# EAGLE board Shiny Lappi-Bigery (EAGLE 9.7.0)

Size 208.9 x 130.84 mm. Coordinates in mm from the lower left corner, seen from the top.
Outline: 0,0 208.9,0 208.9,130.84 0,130.84 0,0
Copper layers (1*16): Top 0.035mm / dielectric 1.5mm / Bottom 0.035mm
Design rules "default": minimum track width 6mil, minimum drill 0.35mm, track to track 6mil, track to pad 6mil, pad to pad 6mil, via to via 6mil, smd to smd 6mil, copper to edge 40mil, drill to drill 6mil, minimum pad ring 10mil, minimum via ring 8mil, stop-mask expansion 4mil, vias tented up to drill 0mil, thermal gap 10mil

## Footprints (pad centres in the part's own frame; a part is rotated, then mirrored left to right if it is on the bottom)
SWITCH-MOMENTARY-PTH-6.5MM = drill 1.016 pad 1.88: 1 -3.251,2.261; 2 3.251,2.261; 3 -3.251,-2.261; 4 3.251,-2.261
ARDUINO-UNO-R3-SHIELD = drill 1.016 pad 1.88: 3.3V 24.13,-2.54; 5V 24.13,0; A0 24.13,12.7; A1 24.13,15.24; A2 24.13,17.78; A3 24.13,20.32; A4 24.13,22.86; A5 24.13,25.4; AREF -24.13,-13.97; D2 -24.13,20.32; D3 -24.13,17.78; D4 -24.13,15.24; D5 -24.13,12.7; D6 -24.13,10.16; D7 -24.13,7.62; D8 -24.13,3.81; D9 -24.13,1.27; D10 -24.13,-1.27; D11 -24.13,-3.81; D12 -24.13,-6.35; D13 -24.13,-8.89; GND@0 24.13,2.54; GND@1 24.13,5.08; GND@2 -24.13,-11.43; IOREF 24.13,-7.62; NC 24.13,-10.16; RES 24.13,-5.08; RX -24.13,25.4; SCL -24.13,-19.05; SDA -24.13,-16.51; TX -24.13,22.86; VIN 24.13,7.62

## Placement (x,y rotation side)
S1  SWITCH_MOMENTARY  [SWITCH-MOMENTARY-PTH-6.5MM]  8.26,44.7 90 top
S2  SWITCH_MOMENTARY  [SWITCH-MOMENTARY-PTH-6.5MM]  27.24,47.72 120 top
S3  SWITCH_MOMENTARY  [SWITCH-MOMENTARY-PTH-6.5MM]  45.25,47.83 120 top
S4  SWITCH_MOMENTARY  [SWITCH-MOMENTARY-PTH-6.5MM]  65.24,48.62 120 top
S5  SWITCH_MOMENTARY  [SWITCH-MOMENTARY-PTH-6.5MM]  83.91,48.5 120 top
S6  SWITCH_MOMENTARY  [SWITCH-MOMENTARY-PTH-6.5MM]  102.25,48.84 120 top
S7  SWITCH_MOMENTARY  [SWITCH-MOMENTARY-PTH-6.5MM]  123.36,48.82 120 top
S8  SWITCH_MOMENTARY  [SWITCH-MOMENTARY-PTH-6.5MM]  144.01,48.43 120 top
S9  SWITCH_MOMENTARY  [SWITCH-MOMENTARY-PTH-6.5MM]  165.97,48.16 120 top
S10  SWITCH_MOMENTARY  [SWITCH-MOMENTARY-PTH-6.5MM]  187.56,48.43 120 top
S11  SWITCH_MOMENTARY  [SWITCH-MOMENTARY-PTH-6.5MM]  18.64,26.41 90 top
S12  SWITCH_MOMENTARY  [SWITCH-MOMENTARY-PTH-6.5MM]  37.23,28.47 120 top
S13  SWITCH_MOMENTARY  [SWITCH-MOMENTARY-PTH-6.5MM]  57.45,28.93 120 top
S14  SWITCH_MOMENTARY  [SWITCH-MOMENTARY-PTH-6.5MM]  77.55,29.5 120 top
S15  SWITCH_MOMENTARY  [SWITCH-MOMENTARY-PTH-6.5MM]  94.99,30 120 top
S16  SWITCH_MOMENTARY  [SWITCH-MOMENTARY-PTH-6.5MM]  115.19,30.17 120 top
S17  SWITCH_MOMENTARY  [SWITCH-MOMENTARY-PTH-6.5MM]  137.21,30.05 120 top
S18  SWITCH_MOMENTARY  [SWITCH-MOMENTARY-PTH-6.5MM]  157.92,30.45 120 top
S19  SWITCH_MOMENTARY  [SWITCH-MOMENTARY-PTH-6.5MM]  179.36,31.14 120 top
S20  SWITCH_MOMENTARY  [SWITCH-MOMENTARY-PTH-6.5MM]  25.78,9.39 90 top
S21  SWITCH_MOMENTARY  [SWITCH-MOMENTARY-PTH-6.5MM]  47.95,9.34 120 top
S22  SWITCH_MOMENTARY  [SWITCH-MOMENTARY-PTH-6.5MM]  68.38,9.99 120 top
S23  SWITCH_MOMENTARY  [SWITCH-MOMENTARY-PTH-6.5MM]  90.84,10.33 120 top
S24  SWITCH_MOMENTARY  [SWITCH-MOMENTARY-PTH-6.5MM]  114.51,10.93 120 top
S25  SWITCH_MOMENTARY  [SWITCH-MOMENTARY-PTH-6.5MM]  135.89,11.08 120 top
S26  SWITCH_MOMENTARY  [SWITCH-MOMENTARY-PTH-6.5MM]  158.66,10.78 120 top
S27  SWITCH_MOMENTARY  [SWITCH-MOMENTARY-PTH-6.5MM]  200.25,31.9 90 top
S28  SWITCH_MOMENTARY  [SWITCH-MOMENTARY-PTH-6.5MM]  181.12,11.57 90 top
S29  SWITCH_MOMENTARY  [SWITCH-MOMENTARY-PTH-6.5MM]  200.65,11.97 90 top
U1  ARDUINO-UNO-R3-SHIELD  [ARDUINO-UNO-R3-SHIELD]  105.79,100.99 90 top

## Library data of the parts
S1-S29 U1 = Tinkercad

## Nets
S28_4: S28.4 S29.4
U1_D2: S3.2 S13.2 S22.2 U1.D2
U1_D3: S4.2 S14.2 S23.2 U1.D3
U1_D4: S5.2 S15.2 S24.2 U1.D4
U1_D5: S6.2 S16.2 S25.2 U1.D5
U1_D6: S7.2 S17.2 S26.2 U1.D6
U1_D7: S8.2 S18.2 U1.D7
U1_D8: S9.2 S19.2 S28.2 U1.D8
U1_D9: S10.2 S27.2 S29.2 U1.D9
U1_D10: S1.4 S2.4 S3.4 S4.4 S5.4 S6.4 S7.4 S8.4 S9.4 S10.4 U1.D10
U1_D11: S11.4 S12.4 S13.4 S14.4 S15.4 S16.4 S17.4 S18.4 S19.4 S27.4 U1.D11
U1_D12: S20.4 S21.4 S22.4 S23.4 S24.4 S25.4 S26.4 U1.D12
U1_RX: S1.2 S11.2 S20.2 U1.RX
U1_TX: S2.2 S12.2 S21.2 U1.TX

## Tracks (layer width: path | path; a pad name or v marks a point on that pad's centre or on a via)
S28_4  (1 unrouted)
U1_D2  (3 unrouted)
U1_D3  (3 unrouted)
U1_D4  (3 unrouted)
U1_D5  (3 unrouted)
U1_D6  (3 unrouted)
U1_D7  (2 unrouted)
U1_D8  (3 unrouted)
U1_D9  (3 unrouted)
U1_D10  (10 unrouted)
U1_D11  (10 unrouted)
U1_D12  (7 unrouted)
U1_RX  (3 unrouted)
U1_TX  (3 unrouted)